# EAGLE board PCB (EAGLE 9.7.0)
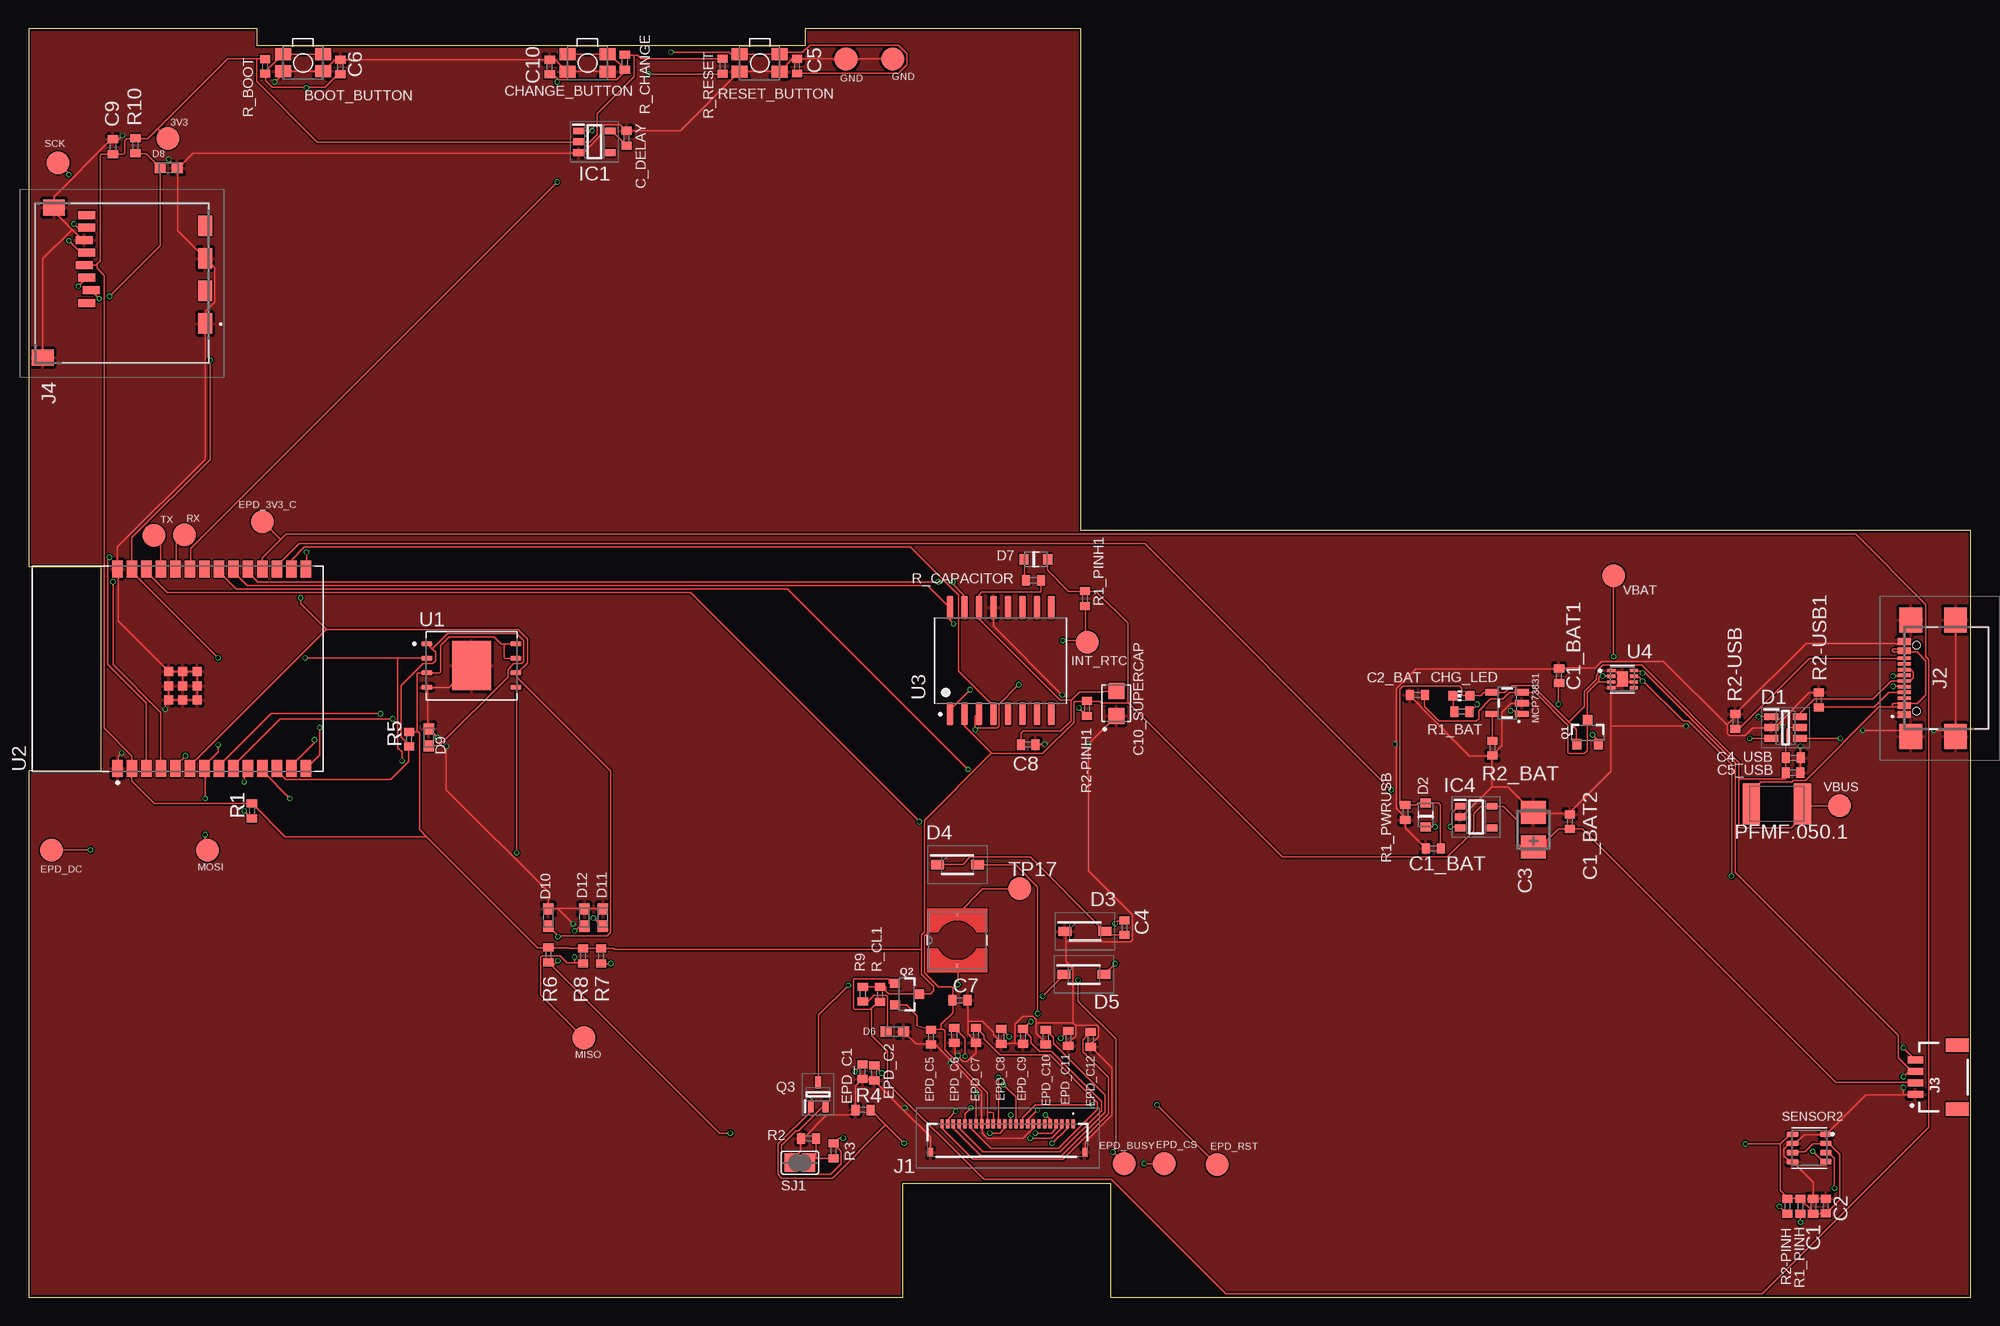
[diagram p0: board, top side]
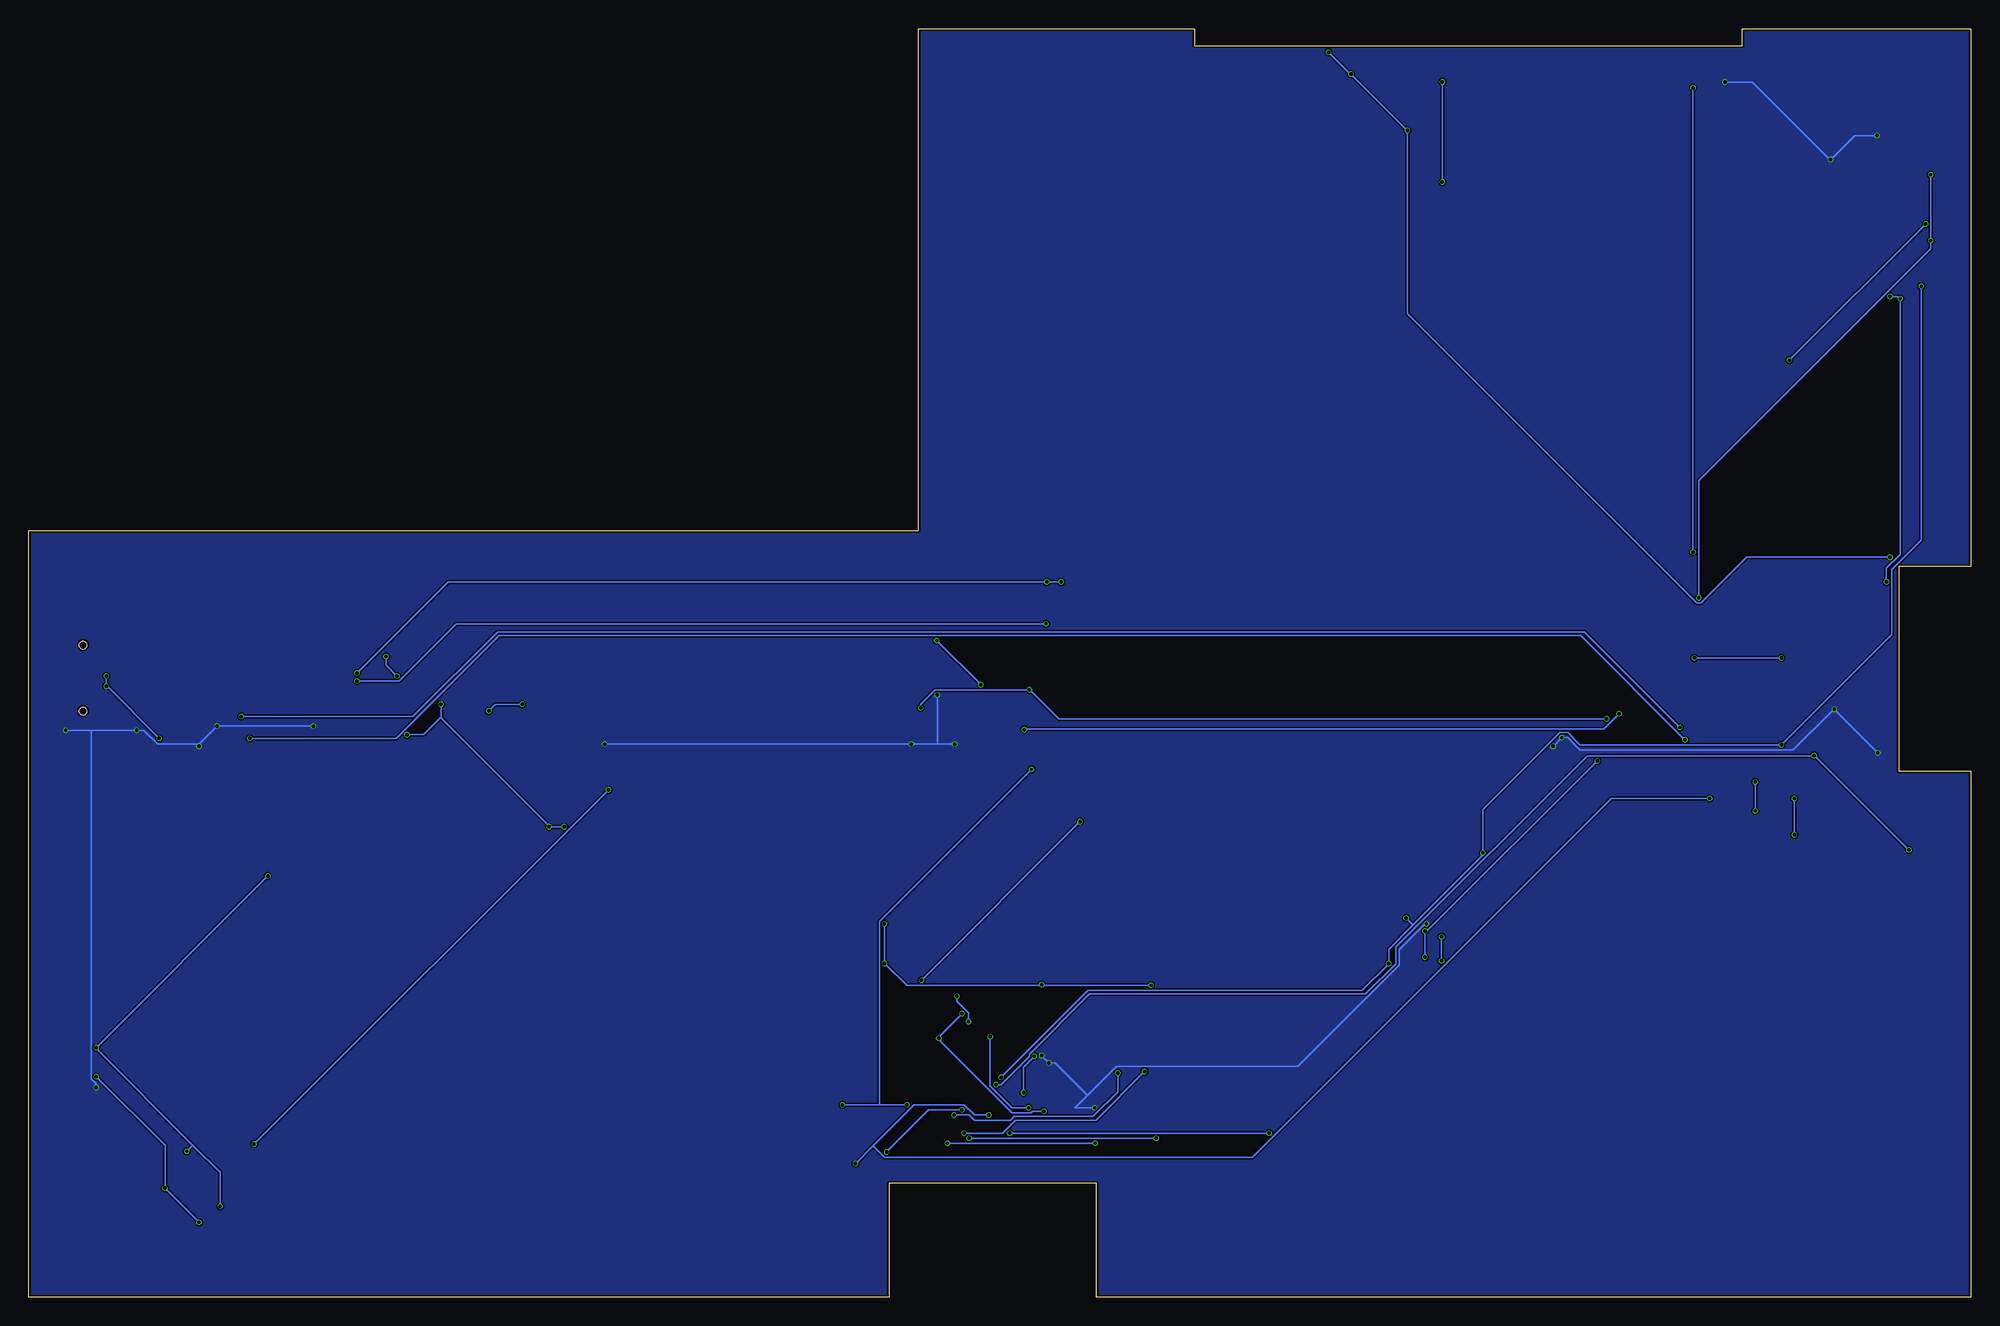
[diagram p1: board, bottom side, seen from below]

Size 170.2 x 111.2 mm. Coordinates in mm from the lower left corner, seen from the top.
Outline: 0,0 76.6,0 76.6,10 94.8,10 94.8,0 170.2,0 170.2,67.2 92.2,67.2 92.2,111.2 68,111.2 68,109.7 20,109.7 20,111.2 0,111.2 0,64.03 6.28,64.03 6.28,46.14 0,46.14 0,0
Copper layers (1*16): Top 0.035mm / dielectric 1.6mm / Bottom 0.035mm
Design rules "jlcpcb-2layers.dru *": minimum track width 5mil, minimum drill 0.3mm, track to track 5mil, track to pad 5mil, pad to pad 5mil, via to via 5mil, smd to smd 5mil, copper to edge 0.2mm, drill to drill 6mil, minimum pad ring 10mil, minimum via ring 3mil, stop-mask expansion 4mil, vias tented up to drill 0mil, thermal gap 10mil
Net classes: 1 Power: width 0.3 mm; 2 Others: width 0.15 mm

## Footprints (pad centres in the part's own frame; a part is rotated, then mirrored left to right if it is on the bottom)
MYBUTTON = smd 1.4 x 1.05: 1 1.75,0.75; 2 -1.75,0.75; 3 -1.75,-0.75; 4 1.75,-0.75
ESP32_WROVER_EAGLE-LTSPICE_C0402 = smd 0.7 x 0.9: 1 -0.65,0; 2 0.65,0
EAGLE-LTSPICE_C0402 = smd 0.7 x 0.9: 1 -0.65,0; 2 0.65,0
RCL_CT3528 = smd 2 x 2.2: + -1.5,0; - 1.5,0
CAPCP3225X100N = smd 1.4 x 1.4: 1 -1.1,0; 2 1.1,0
ADAFRUIT_CHIP-LED0603 = smd 0.8 x 0.8: A 0,-0.75; C 0,0.75
SOT95P280X145-6N = smd 1.2 x 0.6: 1 -1.25,0.95; 2 -1.25,0; 3 -1.25,-0.95; 4 1.25,-0.95; 5 1.25,0; 6 1.25,0.95
ESP32_WROVER_AVX---SD0805S020S1R0_AVX_SD0805S020S1R0_0 = smd 0.8 x 0.9: 1 -1.05,0; 2 1.05,0
SOD3716X135N = smd 1.15 x 0.8: 1 -1.75,0; 2 1.75,0
DIOC1608X36N = smd 0.97 x 0.94: 1 -0.75,0; 2 0.75,0
SOT95P280X125-5N = smd 0.9 x 0.6: 1 -1.4,0.95; 2 -1.4,0; 3 -1.4,-0.95; 4 1.4,-0.95; 5 1.4,0.95
SOT95P280X120-5N = smd 0.9 x 0.6: 1 -1.4,0.95; 2 -1.4,0; 3 -1.4,-0.95; 4 1.4,-0.95; 5 1.4,0.95
FH34SRJ24S05SH99 = smd 0.3 x 0.8: 1 5.75,1.45; 2 5.25,1.45; 3 4.75,1.45; 4 4.25,1.45; 5 3.75,1.45; 6 3.25,1.45; 7 2.75,1.45; 8 2.25,1.45; 9 1.75,1.45; 10 1.25,1.45; 11 0.75,1.45; 12 0.25,1.45; 13 -0.25,1.45; 14 -0.75,1.45; 15 -1.25,1.45; 16 -1.75,1.45; 17 -2.25,1.45; 18 -2.75,1.45; 19 -3.25,1.45; 20 -3.75,1.45; 21 -4.25,1.45; 22 -4.75,1.45; 23 -5.25,1.45; 24 -5.75,1.45 | smd 0.4 x 0.8: MP1 6.75,-1.05; MP2 -6.75,-1.05
SAMACSYS_PARTS_USB4110GFA = smd 0.3 x 1.15: A1 -3.35,3.678; A4 -2.55,3.678; A5 -1.25,3.678; A6 -0.25,3.678; A7 0.25,3.678; A8 1.25,3.678; A9 2.55,3.678; A12 3.35,3.678; B1 3.05,3.678; B4 2.25,3.678; B5 1.75,3.678; B6 0.75,3.678; B7 -0.75,3.678; B8 -1.75,3.678; B9 -2.25,3.678; B12 -3.05,3.678 | smd 2.18 x 2: MP1 -5.11,-0.827; MP2 5.11,-0.827; MP3 -5.11,3.103; MP4 5.11,3.103 | hole 0.65: -2.89,2.603; 2.89,2.603
JST04_1MM_RA = smd 0.6 x 1.35: 1 -1.5,0; 2 -0.5,0; 3 0.5,0; 4 1.5,0 | smd 1.2 x 2: NC1 2.8,-3.675; NC2 -2.8,-3.675
112ATAARR03ATTEND = smd 1.8 x 1.2: G1 10.6,10.4; G2 4.9,10.4; S1 7.75,10.4; S2 2.05,10.4 | smd 1.4 x 1.9: G3 13.6,-3.85; G4 0.45,-2.85 | smd 0.7 x 1.5: P1 8.8,0; P2 7.7,0.4; P3 6.6,0; P4 5.5,-0.2; P5 4.4,0; P6 3.3,-0.2; P7 2.2,0; P8 1.1,0
IND_4828-WE-TPC_WRE = smd 0.406 x 0.203: 1 -2.286,0 | smd 0.305 x 0.152: 2 2.286,0
ESP32_WROVER_SPARKFUN-IC-POWER_SOT23-5 = smd 0.55 x 1.2: 1 -0.95,-1.3; 2 0,-1.3; 3 0.95,-1.3; 4 0.95,1.3; 5 -0.95,1.3
ESP32C6_VARISTOR_CT/CN1812 = smd 1.5 x 3.6: 1 -2.25,0; 2 2.25,0
ESP32_WROVER_SPARKFUN-DISCRETESEMI_SOT23-3 = smd 0.8 x 0.9: 1 -0.95,-1; 2 0.95,-1; 3 0,1.1
SOT65P210X110-3N = smd 1.05 x 0.5: 1 -1.05,0.65; 2 -1.05,-0.65; 3 1.05,0
ESP32_WROVER_EAGLE-LTSPICE_R0402 = smd 0.7 x 0.9: 1 -0.65,0; 2 0.65,0
ESP32_WROVER_BME680_PSON80P300X300X100-8N = smd 1.016 x 0.5: 1 1.458,1.2; 2 1.458,0.4; 3 1.458,-0.4; 4 1.458,-1.2; 5 -1.458,-1.22; 6 -1.458,-0.4; 7 -1.458,0.4; 8 -1.458,1.2
SJ = smd 1.168 x 1.6: 1 -0.762,0; 2 0.762,0
TP20R = smd 2 x 2: TP 0,0
SON127P600X800X80-9N = smd 0.94 x 0.44: 1 -3.895,1.905; 2 -3.895,0.635; 3 -3.895,-0.635; 4 -3.895,-1.905; 5 3.895,-1.905; 6 3.895,-0.635; 7 3.895,0.635; 8 3.895,1.905 | smd 3.4 x 4.3: 9 0,0
XCVR_ESP32-C6-WROOM-1-N8 = smd 1.5 x 0.9: 1 -8.75,5.26; 2 -8.75,3.99; 3 -8.75,2.72; 4 -8.75,1.45; 5 -8.75,0.18; 6 -8.75,-1.09; 7 -8.75,-2.36; 8 -8.75,-3.63; 9 -8.75,-4.9; 10 -8.75,-6.17; 11 -8.75,-7.44; 12 -8.75,-8.71; 13 -8.75,-9.98; 14 -8.75,-11.25; 15 8.75,-11.25; 16 8.75,-9.98; 17 8.75,-8.71; 18 8.75,-7.44; 19 8.75,-6.17; 20 8.75,-4.9; 21 8.75,-3.63; 22 8.75,-2.36; 23 8.75,-1.09; 24 8.75,0.18; 25 8.75,1.45; 26 8.75,2.72; 27 8.75,3.99; 28 8.75,5.26 | smd 0.8 x 0.8: 29_1 -2.755,0.79; 29_2 -1.505,0.79; 29_3 -0.255,0.79; 29_4 -2.755,-0.46; 29_5 -1.505,-0.46; 29_6 -0.255,-0.46; 29_7 -2.755,-1.71; 29_8 -1.505,-1.71; 29_9 -0.255,-1.71
SOIC127P1032X265-16N = smd 2.05 x 0.59: 1 -4.655,4.445; 2 -4.655,3.175; 3 -4.655,1.905; 4 -4.655,0.635; 5 -4.655,-0.635; 6 -4.655,-1.905; 7 -4.655,-3.175; 8 -4.655,-4.445; 9 4.655,-4.445; 10 4.655,-3.175; 11 4.655,-1.905; 12 4.655,-0.635; 13 4.655,0.635; 14 4.655,1.905; 15 4.655,3.175; 16 4.655,4.445
SON50P200X200X80-9N = smd 0.76 x 0.27: 1 -0.985,0.75; 2 -0.985,0.25; 3 -0.985,-0.25; 4 -0.985,-0.75; 5 0.985,-0.75; 6 0.985,-0.25; 7 0.985,0.25; 8 0.985,0.75 | smd 0.9 x 1.3: 9 0,0

## Placement (x,y rotation side)
BOOT_BUTTON  BUTTON_CUSYOMV1  [MYBUTTON]  24.02,108.19 180 top
C1  100nF  [ESP32_WROVER_EAGLE-LTSPICE_C0402]  156.37,7.97 90 top
C1_BAT  4.7uF  [ESP32_WROVER_EAGLE-LTSPICE_C0402]  123.08,39.34 180 top
C1_BAT1  4.7uF  [EAGLE-LTSPICE_C0402]  134.09,54.47 90 top
C1_BAT2  4.7uF  [EAGLE-LTSPICE_C0402]  135.04,41.68 90 top
C2  100nF  [ESP32_WROVER_EAGLE-LTSPICE_C0402]  157.49,7.99 90 top
C2_BAT  4.7uF  [ESP32_WROVER_EAGLE-LTSPICE_C0402]  121.68,52.78 180 top
C3  100uF TANT  [RCL_CT3528]  131.85,40.98 90 top
C4  4.7uF/25V  [ESP32_WROVER_EAGLE-LTSPICE_C0402]  96.01,32.39 90 top
C4_USB  100nF  [ESP32_WROVER_EAGLE-LTSPICE_C0402]  154.64,47.28 0 top
C5  1uF  [ESP32_WROVER_EAGLE-LTSPICE_C0402]  67.31,107.91 90 top
C5_USB  4.7uF  [ESP32_WROVER_EAGLE-LTSPICE_C0402]  154.61,45.97 0 top
C6  100nF  [ESP32_WROVER_EAGLE-LTSPICE_C0402]  27.3,107.83 90 top
C7  10uF  [ESP32_WROVER_EAGLE-LTSPICE_C0402]  81.59,26.03 0 top
C8  100nF  [ESP32_WROVER_EAGLE-LTSPICE_C0402]  87.58,48.43 0 top
C9  100nF  [ESP32_WROVER_EAGLE-LTSPICE_C0402]  7.36,100.83 90 top
C10  100nF  [ESP32_WROVER_EAGLE-LTSPICE_C0402]  45.64,107.83 90 top
C10_SUPERCAP  CPH3225A  [CAPCP3225X100N]  95.29,52.04 90 top
C_DELAY  100nF  [ESP32_WROVER_EAGLE-LTSPICE_C0402]  52.37,101.59 90 top
CHANGE_BUTTON  BUTTON_CUSYOMV1  [MYBUTTON]  48.95,108.18 180 top
CHG_LED  [ADAFRUIT_CHIP-LED0603]  125.54,52.71 90 top
D1  USBLC6-2SC6Y  [SOT95P280X145-6N]  153.95,49.92 0 top
D2  ESP32_WROVER_AVX---SD0805S020S1R0_AVX_SD0805S020S1R0_0_0AVX_SD0805S020S1R0_0_0  [ESP32_WROVER_AVX---SD0805S020S1R0_AVX_SD0805S020S1R0_0]  122.4,42.27 90 top
D3  MBR0530  [SOD3716X135N]  92.56,32.07 0 top
D4  MBR0530  [SOD3716X135N]  81.38,37.91 0 top
D5  MBR0530  [SOD3716X135N]  92.46,28.28 0 top
D6  PGB1010603MR  [DIOC1608X36N]  75.88,23.27 0 top
D7  ESP32_WROVER_AVX---SD0805S020S1R0_AVX_SD0805S020S1R0_0_0AVX_SD0805S020S1R0_0_0  [ESP32_WROVER_AVX---SD0805S020S1R0_AVX_SD0805S020S1R0_0]  88.24,64.68 0 top
D8  PGB1010603MR  [DIOC1608X36N]  12.26,98.97 0 top
D9  PGB1010603MR  [DIOC1608X36N]  35.04,49.07 90 top
D10  PGB1010603MR  [DIOC1608X36N]  45.52,33.27 90 top
D11  PGB1010603MR  [DIOC1608X36N]  50.3,33.27 90 top
D12  PGB1010603MR  [DIOC1608X36N]  48.68,33.27 90 top
EPD_C1  1uF/50V  [ESP32_WROVER_EAGLE-LTSPICE_C0402]  73.05,19.77 90 top
EPD_C2  1uF/50V  [ESP32_WROVER_EAGLE-LTSPICE_C0402]  74.08,19.65 90 top
EPD_C5  0.1uF/50V  [ESP32_WROVER_EAGLE-LTSPICE_C0402]  79.05,22.79 90 top
EPD_C6  1uF/50V  [ESP32_WROVER_EAGLE-LTSPICE_C0402]  81.09,22.95 90 top
EPD_C7  1uF/50V  [ESP32_WROVER_EAGLE-LTSPICE_C0402]  83,22.95 90 top
EPD_C8  1uF/50V  [ESP32_WROVER_EAGLE-LTSPICE_C0402]  85.21,22.85 90 top
EPD_C9  1uF/50V  [ESP32_WROVER_EAGLE-LTSPICE_C0402]  87.12,22.85 90 top
EPD_C10  1uF/50V  [ESP32_WROVER_EAGLE-LTSPICE_C0402]  89.11,22.79 90 top
EPD_C11  1uF/50V  [ESP32_WROVER_EAGLE-LTSPICE_C0402]  91.09,22.69 90 top
EPD_C12  1uF/50V  [ESP32_WROVER_EAGLE-LTSPICE_C0402]  93.05,22.59 90 top
IC1  BD5229G-TR  [SOT95P280X125-5N]  49.55,101.27 0 top
IC4  XC6220A331MR-G  [SOT95P280X120-5N]  126.83,42.09 0 top
J1  FH34SRJ-24S-0.5SH_99_  [FH34SRJ24S05SH99]  85.77,13.74 0 top
J2  SAMACSYS_PARTS_USB4110-GF-A  [SAMACSYS_PARTS_USB4110GFA]  168.02,54.26 90 top
J3  QWIIC_RIGHT_ANGLE  [JST04_1MM_RA]  165.32,19.29 90 top
J4  112A-TAAR-R03_ATTEND  [112ATAARR03ATTEND]  5.05,95.95 270 top
L1  68uH  [IND_4828-WE-TPC_WRE]  81.35,31.28 90 top
MCP73831  ESP32_WROVER_SPARKFUN-IC-POWER_MCP73831  [ESP32_WROVER_SPARKFUN-IC-POWER_SOT23-5]  129.55,52.06 90 top
PFMF.050.1  ESP32C6_VARISTORCN1812  [ESP32C6_VARISTOR_CT/CN1812]  153.19,43.25 0 top
Q1  20V/4.2A/52mΩ/1.4W  [ESP32_WROVER_SPARKFUN-DISCRETESEMI_SOT23-3]  136.6,49.46 0 top
Q2  20V/4.2A/52mΩ/1.4W  [ESP32_WROVER_SPARKFUN-DISCRETESEMI_SOT23-3]  76.9,26.56 270 top
Q3  SI1308EDL-T1-GE3  [SOT65P210X110-3N]  69.16,17.78 90 top
R1  10K  [ESP32_WROVER_EAGLE-LTSPICE_R0402]  19.55,42.63 90 top
R1_BAT  200  [ESP32_WROVER_EAGLE-LTSPICE_R0402]  125.59,51.32 0 top
R1_PINH  10K  [ESP32_WROVER_EAGLE-LTSPICE_R0402]  155.25,7.97 90 top
R1_PINH1  10K  [ESP32_WROVER_EAGLE-LTSPICE_R0402]  92.56,61.24 90 top
R1_PWRUSB  100K  [ESP32_WROVER_EAGLE-LTSPICE_R0402]  120.62,42.5 90 top
R2  2.2  [ESP32_WROVER_EAGLE-LTSPICE_R0402]  68.33,13.91 0 top
R2-PINH  10K  [ESP32_WROVER_EAGLE-LTSPICE_R0402]  154.11,7.97 90 top
R2-PINH1  10K  [ESP32_WROVER_EAGLE-LTSPICE_R0402]  92.73,51.59 90 top
R2-USB  5k1  [ESP32_WROVER_EAGLE-LTSPICE_R0402]  149.56,50.46 90 top
R2-USB1  5k1  [ESP32_WROVER_EAGLE-LTSPICE_R0402]  156.85,52.34 90 top
R2_BAT  2K  [ESP32_WROVER_EAGLE-LTSPICE_R0402]  128.25,48.12 90 top
R3  0.47  [ESP32_WROVER_EAGLE-LTSPICE_R0402]  70.51,12.83 90 top
R4  10K  [ESP32_WROVER_EAGLE-LTSPICE_R0402]  73.09,16.41 0 top
R5  10K  [ESP32_WROVER_EAGLE-LTSPICE_R0402]  33.31,48.91 90 top
R6  10K  [ESP32_WROVER_EAGLE-LTSPICE_R0402]  45.53,30.01 90 top
R7  10K  [ESP32_WROVER_EAGLE-LTSPICE_R0402]  50.15,29.91 90 top
R8  10K  [ESP32_WROVER_EAGLE-LTSPICE_R0402]  48.57,29.91 90 top
R9  10K  [ESP32_WROVER_EAGLE-LTSPICE_R0402]  73.08,26.56 90 top
R10  10K  [ESP32_WROVER_EAGLE-LTSPICE_R0402]  9.33,100.93 90 top
R_BOOT  10K  [ESP32_WROVER_EAGLE-LTSPICE_R0402]  20.71,107.87 90 top
R_CAPACITOR  15  [ESP32_WROVER_EAGLE-LTSPICE_R0402]  88.05,62.84 0 top
R_CHANGE  10K  [ESP32_WROVER_EAGLE-LTSPICE_R0402]  52.22,108.24 90 top
R_CL1  10K  [ESP32_WROVER_EAGLE-LTSPICE_R0402]  74.58,26.53 90 top
R_RESET  10K  [ESP32_WROVER_EAGLE-LTSPICE_R0402]  60.79,107.89 90 top
RESET_BUTTON  BUTTON_CUSYOMV1  [MYBUTTON]  64.05,108.18 180 top
SENSOR2  BME688  [ESP32_WROVER_BME680_PSON80P300X300X100-8N]  156.02,13.08 0 top
SJ1  [SJ]  67.56,11.79 0 top
TP1  TPTP20R  [TP20R]  10.96,66.76 0 top
TP2  TPTP20R  [TP20R]  13.62,66.81 0 top
TP3  TPTP20R  [TP20R]  138.88,63.24 0 top
TP4  TPTP20R  [TP20R]  71.61,108.51 0 top
TP5  TPTP20R  [TP20R]  75.71,108.54 0 top
TP6  TPTP20R  [TP20R]  48.64,22.73 0 top
TP7  TPTP20R  [TP20R]  15.65,39.16 0 top
TP8  TPTP20R  [TP20R]  2.55,99.42 0 top
TP9  TPTP20R  [TP20R]  95.99,11.71 0 top
TP10  TPTP20R  [TP20R]  99.49,11.69 0 top
TP11  TPTP20R  [TP20R]  1.96,39.19 0 top
TP12  TPTP20R  [TP20R]  104.13,11.62 0 top
TP13  TPTP20R  [TP20R]  20.46,67.97 0 top
TP14  TPTP20R  [TP20R]  158.7,43.07 0 top
TP15  TPTP20R  [TP20R]  92.75,57.42 0 top
TP16  TPTP20R  [TP20R]  12.18,101.56 0 top
TP17  TPTP20R  [TP20R]  86.82,35.82 0 top
U1  W25Q512JVEIQ  [SON127P600X800X80-9N]  38.79,55.36 0 top
U2  ESP32-C6-WROOM-1-N8  [XCVR_ESP32-C6-WROOM-1-N8]  13.03,55.09 90 top
U3  DS3231SN#  [SOIC127P1032X265-16N]  85.15,55.8 90 top
U4  MAX17048G+T10  [SON50P200X200X80-9N]  139.66,54.17 0 top

## Library data of the parts
BOOT_BUTTON CHANGE_BUTTON CHG_LED PFMF.050.1 RESET_BUTTON SJ1 TP1-TP17 = DeskAssistant v19 v1
C1 C1_BAT C1_BAT1 C1_BAT2 C2 C2_BAT C4 C4_USB C5 C5_USB C6-C10 C_DELAY EPD_C1 EPD_C2 EPD_C5-EPD_C12 = DeskAssistant v19 v1; SPICEMODEL: NONE; SPICEPREFIX: C
C3 = DeskAssistant v19 v1; SPICEPREFIX: C
C10_SUPERCAP = DeskAssistant v19 v1; AVAILABILITY: Not in stock; CHECK_PRICES: https://www.snapeda.com/parts/CPH3225A/Seiko+Instruments/view-part/?ref=eda; DESCRIPTION: 11 mF (EDLC) Supercapacitor 3.3 V 1210 (3225 Metric) - -; MF: Seiko Instruments; MP: CPH3225A; PACKAGE: 1210 Seiko; PRICE: None; PURCHASE-URL: https://www.snapeda.com/api/url_track_click_mouser/?unipart_id=562593&manufacturer=Seiko Instruments&part_name=CPH3225A&search_term=None; SNAPEDA_LINK: https://www.snapeda.com/parts/CPH3225A/Seiko+Instruments/view-part/?ref=snap
D1 = DeskAssistant v19 v1; AVAILABILITY: In Stock; CHECK_PRICES: https://www.snapeda.com/parts/USBLC6-2SC6Y/STMicroelectronics/view-part/?ref=eda; DESCRIPTION: 17V Clamp 5A (8/20µs) Ipp Tvs Diode Surface Mount SOT-23-6; DETAILS: USBLC6-2SC6Y; MF: STMicroelectronics; MP: USBLC6-2SC6Y; NUME: D1; PACKAGE: SOT-23-6 STMicroelectronics; PRICE: None; SNAPEDA_LINK: https://www.snapeda.com/parts/USBLC6-2SC6Y/STMicroelectronics/view-part/?ref=snap
D2 = DeskAssistant v19 v1; CENTROID_NOT_SPECIFIED: No; DATASHEET: http://datasheets.avx.com/schottky.pdf; DETAILS: SD0805S020S1R0; DIGIKEY_DESCRIPTION: DIODE SCHOTTKY 20V 1A 0805; DIGIKEY_PART_NUMBER: 478-7800-1-ND; LEAD_FREE: yes; MF: AVX; MOUSER_PART_NUMBER: 581-SD0805S020S1R0; PACKAGE: 0805 (2012 metric); PREFIX: D; ROHS: yes; TEMPERATURE_RANGE_HIGH: +125°C; TEMPERATURE_RANGE_LOW: -55°C
D3-D5 = DeskAssistant v19 v1; AVAILABILITY: In Stock; CHECK_PRICES: https://www.snapeda.com/parts/MBR0530/Onsemi/view-part/?ref=eda; DESCRIPTION: Diode Schottky 30 V 500mA Surface Mount SOD-123; MF: ON Semiconductor; MP: MBR0530; PACKAGE: SOD-123-2 ON Semiconductor; PRICE: None; PURCHASE-URL: https://www.snapeda.com/api/url_track_click_mouser/?unipart_id=179458&manufacturer=ON Semiconductor&part_name=MBR0530&search_term=None; SNAPEDA_LINK: https://www.snapeda.com/parts/MBR0530/Onsemi/view-part/?ref=snap
D6 D8-D12 = DeskAssistant v19 v1; AVAILABILITY: In Stock; CHECK_PRICES: https://www.snapeda.com/parts/PGB1010603MR/Littelfuse/view-part/?ref=eda; DESCRIPTION: 150V (Typ) Clamp - Ipp Tvs Diode Surface Mount 0603 (1608 Metric); MF: Littelfuse Inc.; MP: PGB1010603MR; PACKAGE: 0603 Littelfuse Inc.; PRICE: None; PURCHASE-URL: https://www.snapeda.com/api/url_track_click_mouser/?unipart_id=5659453&manufacturer=Littelfuse Inc.&part_name=PGB1010603MR&search_term=None; SNAPEDA_LINK: https://www.snapeda.com/parts/PGB1010603MR/Littelfuse/view-part/?ref=snap
D7 = DeskAssistant v19 v1; CENTROID_NOT_SPECIFIED: No; DATASHEET: http://datasheets.avx.com/schottky.pdf; DIGIKEY_DESCRIPTION: DIODE SCHOTTKY 20V 1A 0805; DIGIKEY_PART_NUMBER: 478-7800-1-ND; LEAD_FREE: yes; MF: AVX; MOUSER_PART_NUMBER: 581-SD0805S020S1R0; PACKAGE: 0805 (2012 metric); PREFIX: D; ROHS: yes; TEMPERATURE_RANGE_HIGH: +125°C; TEMPERATURE_RANGE_LOW: -55°C; VALOARE: SD0805S020S1R0
IC1 = DeskAssistant v19 v1; DESCRIPTION: Voltage Detector with Adjustable Delay Time: CMOS processes are utilized to develop high precision, low current consumption CMOS reset ICs that allow arbitrary setting of the delay time. The extensive lineup includes both Nch Open Drain and CMOS output types in a wide range of detection voltages (from 2.3V to 6.0V, in 0.1V steps), enabling selection of the ideal solution based on customer requirements. In addition, the entire series is of course both lead-free and RoHS-compliant.; HEIGHT: 1.25mm; MANUFACTURER_NAME: ROHM Semiconductor; MANUFACTURER_PART_NUMBER: BD5229G-TR; MOUSER_PART_NUMBER: 755-BD5229G-TR; MOUSER_PRICE-STOCK: https://www.mouser.co.uk/ProductDetail/ROHM-Semiconductor/BD5229G-TR?qs=4kLU8WoGk0vvnhrrYwdszw%3D%3D
IC4 = DeskAssistant v19 v1; DESCRIPTION: LDO Voltage Regulators; HEIGHT: 1.2mm; MANUFACTURER_NAME: Torex; MANUFACTURER_PART_NUMBER: XC6220A331MR-G; MOUSER_PART_NUMBER: 865-XC6220A331MR-G; MOUSER_PRICE-STOCK: https://www.mouser.co.uk/ProductDetail/Torex-Semiconductor/XC6220A331MR-G?qs=AsjdqWjXhJ8ZSWznL1J0gg%3D%3D
J1 = DeskAssistant v19 v1; DESCRIPTION: 24 Position FFC, FPC Connector Contacts, Top and Bottom 0.020" (0.50mm) Surface Mount, Right Angle; HEIGHT: 1.1mm; MANUFACTURER_NAME: Hirose; MANUFACTURER_PART_NUMBER: FH34SRJ-24S-0.5SH(99); MOUSER_PART_NUMBER: 798-FH34SRJ24S05SH99; MOUSER_PRICE-STOCK: https://www.mouser.co.uk/ProductDetail/Hirose-Connector/FH34SRJ-24S-0.5SH99?qs=vcbW%252B4%252BSTIpKBl5ap9J8Fw%3D%3D
J2 = DeskAssistant v19 v1; DESCRIPTION: CONN USB 2.0 TYPE-C R/A SMT; HEIGHT: 3.26mm; MANUFACTURER_NAME: GCT (GLOBAL CONNECTOR TECHNOLOGY); MANUFACTURER_PART_NUMBER: USB4110-GF-A; MOUSER_PART_NUMBER: 640-USB4110-GF-A; MOUSER_PRICE-STOCK: https://www.mouser.co.uk/ProductDetail/GCT/USB4110-GF-A?qs=KUoIvG%2F9IlYiZvIXQjyJeA%3D%3D
J3 = DeskAssistant v19 v1; PROD_ID: CONN-13694
J4 = DeskAssistant v19 v1; DESCRIPTION: Micro SD Card Socket, Push-Push Type, Top Mount, SMT, H=1.83mm, 10u; HEIGHT: 1.9mm; MANUFACTURER_NAME: ATTEND; MANUFACTURER_PART_NUMBER: 112A-TAAR-R03 ATTEND
L1 = DeskAssistant v19 v1; COPYRIGHT: Copyright (C) 2024 Ultra Librarian. All rights reserved.; MANUFACTURER_PART_NUMBER: 744043680; MFR_NAME: Wurth Electronics; VALOARE: 68uH
MCP73831 = DeskAssistant v19 v1; PROD_ID: IC-09995
Q1 Q2 = DeskAssistant v19 v1; DETAILS: DMG2305UX-7; PROD_ID: TRAN-14388
Q3 = DeskAssistant v19 v1; AVAILABILITY: In Stock; CHECK_PRICES: https://www.snapeda.com/parts/SI1308EDL-T1-GE3/Vishay+Siliconix/view-part/?ref=eda; DESCRIPTION: Si1308EDL-T1-GE3 N-channel MOSFET Transistor, 1.5 A, 30 V, 3-Pin SC-70 | Siliconix / Vishay SI1308EDL-T1-GE3; MF: Vishay Siliconix; MP: SI1308EDL-T1-GE3; PACKAGE: SOT-323 Vishay Semiconductor; PRICE: None; PURCHASE-URL: https://www.snapeda.com/api/url_track_click_mouser/?unipart_id=274603&manufacturer=Vishay Siliconix&part_name=SI1308EDL-T1-GE3&search_term=None; SNAPEDA_LINK: https://www.snapeda.com/parts/SI1308EDL-T1-GE3/Vishay+Siliconix/view-part/?ref=snap
R1 R1_BAT R1_PINH R1_PINH1 R1_PWRUSB R2 R2-PINH R2-PINH1 R2-USB R2-USB1 R2_BAT R3-R10 R_BOOT R_CAPACITOR R_CHANGE R_CL1 R_RESET = DeskAssistant v19 v1; SPICEMODEL: NONE; SPICEPREFIX: R
SENSOR2 = DeskAssistant v19 v1; AVAILABILITY: Unavailable; DESCRIPTION: Integrated Environmental Unit; MF: Bosch Sensortec; MP: BME680; PACKAGE: LGA-8 Bosch Tools; PRICE: None
U1 = DeskAssistant v19 v1; AVAILABILITY: In Stock; CHECK_PRICES: https://www.snapeda.com/parts/W25Q512JVEIQ/Winbond+Electronics/view-part/?ref=eda; DESCRIPTION: FLASH - NOR Memory IC 512Mb (64M x 8) SPI - Quad I/O 133 MHz 8-WSON (8x6); MF: Winbond Electronics; MP: W25Q512JVEIQ; PACKAGE: Package; PRICE: None; SNAPEDA_LINK: https://www.snapeda.com/parts/W25Q512JVEIQ/Winbond+Electronics/view-part/?ref=snap
U2 = DeskAssistant v19 v1; AVAILABILITY: In Stock; CHECK_PRICES: https://www.snapeda.com/parts/ESP32-C6-WROOM-1-N8/Espressif+Systems/view-part/?ref=eda; DESCRIPTION: Multiprotocol Modules ESP32-C6 module, Wi-Fi 6 in 2.4 GHz band, Bluetooth 5, Zigbee 3.0 and Thread. ESP34-WROOM Compatible - ENGINEERING SAMPLE; MF: Espressif Systems; MP: ESP32-C6-WROOM-1-N8; PACKAGE: None; PRICE: None; SNAPEDA_LINK: https://www.snapeda.com/parts/ESP32-C6-WROOM-1-N8/Espressif+Systems/view-part/?ref=snap
U3 = DeskAssistant v19 v1; AVAILABILITY: In Stock; CHECK_PRICES: https://www.snapeda.com/parts/DS3231SN%23/Analog+Devices/view-part/?ref=eda; DESCRIPTION: Extremely Accurate I²C-Integrated RTC/TCXO/Crystal; MF: Analog Devices; MP: DS3231SN#; PACKAGE: SOIC-16 Maxim; PRICE: None; PURCHASE-URL: https://www.snapeda.com/api/url_track_click_mouser/?unipart_id=99048&manufacturer=Analog Devices&part_name=DS3231SN#&search_term=None; SNAPEDA_LINK: https://www.snapeda.com/parts/DS3231SN%23/Analog+Devices/view-part/?ref=snap
U4 = DeskAssistant v19 v1; AVAILABILITY: In Stock; CHECK_PRICES: https://www.snapeda.com/parts/MAX17048G+T10/Analog+Devices/view-part/?ref=eda; DESCRIPTION: 3µA 1-Cell/2-Cell Fuel Gauge with ModelGauge; MF: Analog Devices; MP: MAX17048G+T10; PACKAGE: TDFN-8 Maxim; PRICE: None; PURCHASE-URL: https://www.snapeda.com/api/url_track_click_mouser/?unipart_id=329239&manufacturer=Analog Devices&part_name=MAX17048G+T10&search_term=None; SNAPEDA_LINK: https://www.snapeda.com/parts/MAX17048G+T10/Analog+Devices/view-part/?ref=snap

## Nets
3V3: C1_BAT2.1 C3.+ C9.1 D7.2 IC1.2 IC4.5 J3.2 J4.P4 Q2.3 R1.2 R1_PINH1.2 R2-PINH1.2 R5.2 R6.2 R7.2 R8.2 R9.2 R10.2 R_BOOT.2 R_CHANGE.2 R_CL1.2 R_RESET.2 TP16.TP U1.3 U1.7 U1.8 U2.2 U3.2
32KHZ [Others]: R2-PINH1.1 U2.9 U3.1
DN [Others]: D1.4 J2.A7 J2.B7
DP [Others]: D1.6 J2.A6 J2.B6
EDP_CS [Others]: D6.1 R9.1
EPD_3V3: C7.1 EPD_C5.2 J1.15 J1.16 L1.2 Q2.2 TP17.TP
EPD_3V3_C: Q2.1 R_CL1.1 TP13.TP U2.18
EPD_BUSY [Others]: J1.9 TP9.TP U2.26
EPD_CS [Others]: J1.12 TP10.TP U2.11
EPD_DC [Others]: J1.11 TP11.TP U2.5
EPD_RST [Others]: J1.10 TP12.TP U2.21
FLASH_CS [Others]: D9.1 R5.1 U1.1 U2.12
GDR [Others]: J1.2 Q3.1 R4.2
GND [Others]: BOOT_BUTTON.1 BOOT_BUTTON.2 C1.2 C1_BAT1.2 C1_BAT2.2 C1_BAT.2 C2.2 C2_BAT.2 C3.- C4_USB.2 C5.2 C5_USB.2 C6.2 C7.2 C8.2 C9.2 C10.2 C10_SUPERCAP.1 C_DELAY.2 CHANGE_BUTTON.1 CHANGE_BUTTON.2 D1.2 D3.1 D6.2 D8.2 D9.2 D10.2 D11.2 D12.2 EPD_C1.1 EPD_C2.1 EPD_C5.1 EPD_C6.1 EPD_C7.1 EPD_C8.1 EPD_C9.1 EPD_C10.1 EPD_C11.1 EPD_C12.1 IC1.3 IC4.2 J1.8 J1.17 J1.MP1 J1.MP2 J2.A1 J2.A12 J2.B1 J2.B12 J2.MP1 J2.MP2 J2.MP3 J2.MP4 J3.1 J4.G1 J4.G2 J4.G3 J4.G4 J4.P6 MCP73831.2 R1_PWRUSB.1 R2-USB1.2 R2-USB.2 R2.1 R2_BAT.1 R4.1 RESET_BUTTON.1 RESET_BUTTON.2 SENSOR2.1 SENSOR2.5 SENSOR2.7 SJ1.1 TP4.TP TP5.TP U1.4 U1.9 U2.1 U2.28 U2.29_1 U2.29_2 U2.29_3 U2.29_4 U2.29_5 U2.29_6 U2.29_7 U2.29_8 U2.29_9 U3.13 U4.1 U4.4 U4.6 U4.9
GPIO8 [Others]: R1.1 U2.10
I2C_PW [Others]: C1.1 C2.1 R1_PINH.2 R2-PINH.2 SENSOR2.2 SENSOR2.6 SENSOR2.8 U2.17
INT_RTC [Others]: R1_PINH1.1 TP15.TP U2.8 U3.3
IO/BOOT [Others]: BOOT_BUTTON.3 BOOT_BUTTON.4 C6.1 R_BOOT.1 U2.15
IO/CHANGE [Others]: C10.1 CHANGE_BUTTON.3 CHANGE_BUTTON.4 R_CHANGE.1 U2.23
MISO [Others]: D12.1 J4.P7 R8.1 TP6.TP U1.2 U2.27
MOSI [Others]: D11.1 J1.14 J4.P3 R7.1 TP7.TP U1.5 U2.7
N$1 [Others]: J2.A5 R2-USB1.1
N$2 [Others]: J2.B5 R2-USB.1
N$3 [Others]: C1_BAT1.1 D2.1 IC4.1 IC4.3 Q1.2
N$4 [Others]: D7.1 R_CAPACITOR.1
N$5 [Others]: C_DELAY.1 IC1.5
N$6 [Others]: MCP73831.1 R1_BAT.2
N$7 [Others]: C4.1 D3.2 D4.1
N$8 [Others]: CHG_LED.C R1_BAT.1
N$9 [Others]: EPD_C12.2 J1.24
N$12 [Others]: EPD_C10.2 J1.22
N$14 [Others]: EPD_C8.2 J1.20
N$15 [Others]: EPD_C7.2 J1.19
N$16 [Others]: EPD_C6.2 J1.18
N$17 [Others]: MCP73831.5 R2_BAT.2
N$18 [Others]: EPD_C1.2 J1.4
N$19 [Others]: EPD_C2.2 J1.5
PREVGH [Others]: D5.1 EPD_C9.2 J1.21
PREVGL [Others]: D4.2 EPD_C11.2 J1.23
RESE [Others]: J1.3 Q3.2 R3.2
RESE' [Others]: R2.2 R3.1 SJ1.2
RESET [Others]: C5.1 IC1.1 R_RESET.1 RESET_BUTTON.3 RESET_BUTTON.4 U2.3
RTC_RST [Others]: U2.16 U3.4
RX [Others]: TP2.TP U2.24
SCK [Others]: D10.1 J1.13 J4.P5 R6.1 TP8.TP U1.6 U2.6
SCL [Others]: J3.4 R2-PINH.1 SENSOR2.4 U2.20 U3.16 U4.7
SDA [Others]: J3.3 R1_PINH.1 SENSOR2.3 U2.19 U3.15 U4.8
SRC [Others]: C4.2 D5.2 L1.1 Q3.3
SS_SD [Others]: D8.1 J4.P2 R10.1 U2.4
TX [Others]: TP1.TP U2.25
USB_D+ [Others]: D1.1 U2.14
USB_D- [Others]: D1.3 U2.13
VBAT: C2_BAT.1 MCP73831.3 Q1.3 TP3.TP U4.2 U4.3
VBUS: C1_BAT.1 C4_USB.1 C5_USB.1 CHG_LED.A D1.5 D2.2 MCP73831.4 PFMF.050.1.2 Q1.1 R1_PWRUSB.2 TP14.TP
VRTC: C8.1 C10_SUPERCAP.2 R_CAPACITOR.2 U3.14
VUSB: J2.A4 J2.A9 J2.B4 J2.B9 PFMF.050.1.1

## Tracks (layer width: path | path; a pad name or v marks a point on that pad's centre or on a via)
3V3
  Top 0.127: 52.99,108.83 52.96,108.86 52.26,108.86 R_CHANGE.2 | 52.99,108.83 53.02,108.8 53.02,106.96 49.78,103.72 49.78,101.88 49.15,101.24 48.2,101.24 IC1.2 48.13,101.24 25.27,101.24 19.94,106.58 19.94,108.55 | R_RESET.2 60.77,108.55 53.66,108.55 53.34,108.86 53.02,108.86 52.99,108.83 | 19.94,108.55 17.4,108.55 11.27,102.42 | 19.94,108.55 20.7,108.55 R_BOOT.2 | 11.27,102.42 10.41,101.56 9.34,101.56 R10.2 9.27,101.56 8.57,101.56 8.38,101.37 8.38,100.23 8.32,100.16 7.37,100.16 C9.1 7.3,100.16 6.29,100.16 6.22,100.1 6.22,90.83 5.94,90.54 | 5.94,90.54 5.84,90.45 4.89,90.45 J4.P4 | J3.2 165.29,18.82 158.37,18.82 136.14,41.05 135.06,41.05 C1_BAT2.1 135,41.05 134.05,41.05 133.03,40.03 133.03,39.52 132.97,39.46 131.89,39.46 C3.+ 131.83,39.46 130.75,39.46 130.43,39.77 130.43,41.81 129.22,43.01 128.27,43.01 IC4.5 128.21,43.01 127.25,43.01 126.62,42.38 126.62,40.85 124.33,38.57 109.86,38.57 96.3,52.13 | D7.2 89.28,64.67 89.28,63.71 91.12,61.87 92.52,61.87 R1_PINH1.2 92.58,61.87 93.53,61.87 96.33,59.08 96.33,52.16 96.3,52.13 | R9.2 74.55,27.2 R_CL1.2 74.61,27.2 75.12,27.2 75.12,26.82 75.37,26.57 77.98,26.57 Q2.3 78.04,26.57 78.99,26.57 79.26,26.83 79.26,27.26 78.23,28.28 78.23,30.5 | 84.36,47.68 81.98,50.06 U3.2 | 84.36,47.68 84.39,47.65 88.84,47.65 91.57,50.38 91.57,52.16 91.63,52.22 92.71,52.22 R2-PINH1.2 92.77,52.22 93.85,52.22 93.98,52.09 96.27,52.09 96.3,52.13 | 78.23,30.5 78.23,31.77 78.49,32.03 78.49,41.81 84.36,47.68 | 41.69,57.21 41.72,57.24 42.67,57.24 U1.8 | 41.69,57.21 41.66,57.17 41.66,56.03 41.72,55.97 42.67,55.97 U1.7 | 34.04,49.55 33.34,49.55 R5.2
  Top 0.127: 34.04,49.55 34.04,54.63 34.1,54.7 34.86,54.7 U1.3 34.92,54.7 36.01,54.7 36.07,54.76 36.07,57.11 36.83,57.87 40.77,57.87 41.4,57.24 41.66,57.24 41.69,57.21 | 34.85,40.36 34.23,40.98 34.23,43.27 34.25,43.27 34.25,49.47 34.16,49.55 34.04,49.55 | 34.85,40.36 44.58,30.63 45.53,30.63 R6.2 45.59,30.63 47.37,30.63 47.43,30.57 48.51,30.57 R8.2 50.1,30.57 R7.2 50.16,30.57 51.24,30.57 51.31,30.5 78.23,30.5 | 5.94,90.54 5.97,90.51 5.97,90.19 6.6,89.56 6.6,49.87 9.02,47.46 9.02,46.38 U2.2 9.02,46.31 9.02,45.24 10.99,43.27 19.49,43.27 R1.2 22.47,40.36 34.85,40.36 | 11.27,102.42 12.13,101.56 TP16.TP
32KHZ  (via drill 0.3)
  Top 0.15: v92.01,51.65 92.71,50.95 R2-PINH1.1 | v82.49,53.24 80.71,51.46 80.71,51.2 U3.1 | v31.88,50.7 22.04,50.7 17.97,46.63 17.97,46.38 U2.9
  Bottom 0.15: v92.01,51.65 92.01,51.97 90.74,53.24 v82.49,53.24 82.42,53.24 79.88,50.7 v31.88,50.7
DN  (via drill 0.3)
  Top 0.15: v163.39,53.55 164.34,53.55 J2.B7 | v163.39,54.44 164.27,54.44 J2.A7 | v158.75,48.98 155.26,48.98 D1.4
  Bottom 0.15: v163.39,54.44 v163.39,53.55 163.32,53.55 v158.75,48.98
DP
  Top 0.15: J2.B6 164.4,54.95 164.97,54.95 165.16,54.76 165.16,54.32 164.91,54.06 164.4,54.06 J2.A6 164.27,54 163.19,54 161.61,52.41 156.46,52.41 155.26,51.2 155.26,50.89 D1.6
EDP_CS
  Top 0.15: R9.1 73.09,25.93 73.53,25.93 74.04,26.44 75.12,26.44 75.25,26.31 75.25,23.39 75.18,23.33 D6.1
EPD_3V3
  Top 0.127: 84.04,16.18 84.07,16.22 84.45,16.22 84.52,16.15 J1.15 | 84.04,16.18 84.01,16.15 J1.16 | 77.85,23.77 77.85,24.66 76.9,25.61 75.95,25.61 Q2.2 | 77.85,23.77 | 77.85,23.77 EPD_C5.2 79.06,23.45 79.88,23.45 79.92,23.49 | 79.92,23.49 79.95,23.52 79.95,23.9 80.96,24.92 80.96,26 C7.1 80.96,26.06 80.96,27.14 80.9,27.2 79.69,27.2 78.49,28.41 78.49,31.65 78.74,31.9 78.74,32.03 80.26,33.55 81.34,33.55 L1.2 81.41,33.62 83.57,35.77 86.81,35.77 TP17.TP | 84.04,16.18 84.01,16.22 84.01,17.93 80.26,21.68 80.26,23.33 80.14,23.45 79.95,23.45 79.92,23.49
EPD_3V3_C
  Top 0.127: 73.82,25.27 73.79,25.23 72.33,25.23 72.26,25.3 72.26,27.84 72.33,27.9 75.31,27.9 75.37,27.84 75.37,27.52 75.88,27.52 Q2.1 | 73.82,25.27 74.42,25.87 74.55,25.87 R_CL1.1 | 22.07,66.41 22.54,66.89 160.08,66.89 166.24,60.73 166.24,56.16 166.5,55.9 166.5,14.88 151.89,0.28 104.9,0.28 94.87,10.31 83.69,10.31 75.25,18.76 75.25,21.55 73.85,22.95 73.85,25.23 73.82,25.27 | 22.07,66.41 20.45,64.79 20.45,63.84 U2.18 | 22.07,66.41 20.51,67.97 TP13.TP
EPD_BUSY  (via drill 0.3)
  Top 0.15: v88.39,16.41 87.57,15.58 87.57,15.2 J1.9 | TP9.TP 95.95,11.77 v95,12.72 95,12.79 95.25,13.04 95.25,22.63 91.95,25.93 v91.95,27.77 | v78.04,41.68 57.98,61.75 12.13,61.75 10.35,63.52 10.35,63.78 U2.26
  Bottom 0.15: v88.39,16.41 91.31,16.41 v95,12.72 | v91.95,27.77 v78.04,41.68
EPD_CS  (via drill 0.3)
  Top 0.15: v86.04,15.96 86.04,15.2 J1.12 | v97.73,11.71 99.44,11.71 TP10.TP | v22.86,43.71 20.51,46.06 20.51,46.31 U2.11
  Bottom 0.15: v86.04,15.96 87.31,15.96 88.2,16.85 92.58,16.85 96.17,13.26 | v97.73,11.71 96.17,13.26 | v22.86,43.71 31.5,43.71 62.93,12.28 95.19,12.28 96.17,13.26
EPD_DC  (via drill 0.3)
  Top 0.15: v85.41,18.63 86.49,17.55 86.49,15.2 J1.11 | v13.72,47.46 12.89,46.63 12.89,46.38 U2.5 | v5.4,39.2 1.97,39.2 TP11.TP
  Bottom 0.15: v85.41,18.63 84.96,18.63 82.49,21.11 82.49,21.3 77.22,26.57 53.02,26.57 50.35,29.23 50.35,30.69 33.59,47.46 v13.72,47.46 13.65,47.46 v5.4,39.2
EPD_RST  (via drill 0.3)
  Top 0.15: v93.22,16.85 88.2,16.85 87.06,15.71 87.06,15.2 J1.10 | v98.87,16.85 104.08,11.64 TP12.TP | v82.3,46.25 66.48,62.06 18.16,62.06 16.7,63.52 16.7,63.78 U2.21
  Bottom 0.15: v98.87,16.85 95.63,16.85 | 95.63,16.85 v93.22,16.85 | v82.3,46.25 95.63,32.92 95.63,16.85
FLASH_CS
  Top 0.15: 35.34,56.83 34.92,57.24 U1.1 | 35.34,56.83 35.62,56.54 35.62,55.78 35.37,55.52 34.54,55.52 32.64,53.62 32.64,49.11 33.27,48.47 33.27,48.28 R5.1 33.27,48.22 33.27,46.95 31.69,45.36 22.48,45.36 21.78,46.06 21.78,46.31 U2.12 | 35.34,56.83 36.7,58.19 42.74,58.19 43.37,57.55 43.37,55.71 43.18,55.52 42.48,55.52 41.97,55.02 41.97,54.38 35.94,48.35 35.05,48.35 D9.1
GDR  (via drill 0.3)
  Top 0.15: v89.66,13.49 91,14.82 91,15.14 J1.2 | 75.09,15.1 73.79,16.41 R4.2 | 75.09,15.1 v76.71,13.49 | 75.09,15.1 70.42,10.44 65.98,10.44 65.66,10.75 65.66,13.42 68.45,16.22 68.45,16.72 Q3.1
  Bottom 0.15: v76.71,13.49 v89.66,13.49
GND  (via drill 0.3)
  Top 0.15: 46.38,34.06 48.64,34.06 D12.2 48.7,34.06 50.29,34.06 D11.2 | 46.38,34.06 45.53,34.06 D10.2 45.53,34.12 45.53,35.52 36.58,44.47 v36.58,48.28 | U1.9 38.73,55.33 36.83,53.43 34.99,53.43 U1.4 34.92,53.43 34.92,49.94 D9.2 v35.81,49.05 | TP5.TP 75.69,108.55 71.63,108.55 TP4.TP 71.56,108.55 67.37,108.55 C5.2 67.31,108.55 66.93,108.55 65.85,107.47 RESET_BUTTON.2 65.79,107.47 62.36,107.47 RESET_BUTTON.1 62.23,107.4 57.09,102.26 52.39,102.26 C_DELAY.2 52.32,102.26 51.82,102.77 50.42,102.77 50.29,102.64 50.29,102.01 48.64,100.35 48.2,100.35 IC1.3 48.13,100.29 14.41,100.29 13.08,98.96 D8.2 | CHANGE_BUTTON.2 50.67,107.47 47.24,107.47 CHANGE_BUTTON.1 47.18,107.4 46.16,108.42 45.66,108.42 C10.2 45.59,108.48 27.37,108.48 C6.2 27.24,108.42 26.8,108.42 25.78,107.4 BOOT_BUTTON.2 25.72,107.47 22.29,107.47 BOOT_BUTTON.1 22.23,107.4 22.23,107.21 v21.53,106.51 | 3.78,93.59 2.22,95.15 2.22,95.46 J4.G4 2.22,95.53 2.22,96.48 7.18,101.43 7.3,101.43 C9.2 7.43,101.5 7.87,101.5 v8.19,101.81 | 3.78,93.59 4.7,92.67 4.83,92.67 J4.P6 | 3.78,93.59 1.21,91.02 1.21,82.38 J4.G3 | D8.2 13.02,98.96 13.02,93.5 15.43,91.08 J4.G2 15.49,91.02 16.26,90.26 16.26,87.21 15.49,86.45 15.49,85.37 J4.G1 15.43,85.31 15.43,73.43 7.75,65.75 7.75,63.91 U2.28 7.81,63.78 7.81,59.27 12.19,54.89 U2.29_3 12.26,54.82 13.46,54.82 U2.29_6 | U2.29_1 12.26,52.35 12.26,53.55 U2.29_2 | U2.29_1 12.32,52.35 13.46,52.35 U2.29_4 13.53,52.35 14.73,52.35 U2.29_7 14.73,52.41 14.73,53.55 U2.29_8 14.73,53.62 14.73,54.76 U2.29_9 13.53,54.82 U2.29_6 | v8.13,47.71 7.81,47.39 7.81,46.38 U2.1
  Top 0.15: v11.94,51.52 11.94,52.03 12.19,52.28 U2.29_1 | U2.29_5 13.46,53.62 13.46,54.76 U2.29_6 | v12.26,99.72 12.95,99.02 D8.2 | v89.03,48.47 88.27,48.47 C8.2 | C10_SUPERCAP.1 95.25,50.89 v92.84,48.47 92.84,37.36 96.71,33.49 96.71,31.33 96.52,31.14 90.87,31.14 | v90.55,52.79 84.52,58.83 84.52,60.41 U3.13 | SJ1.1 66.8,11.83 66.8,11.96 67.63,12.79 67.63,13.87 R2.1 67.75,13.93 67.88,13.93 69.91,15.96 71.94,15.96 72.39,16.41 R4.1 72.45,16.41 72.45,18.5 73.03,19.07 EPD_C1.1 73.09,19.07 73.98,19.07 74.04,19.01 EPD_C2.1 74.11,18.95 76.61,16.44 | 76.61,16.44 78.99,14.06 78.99,12.72 J1.MP2 | D6.2 76.64,23.27 77.72,22.19 78.99,22.19 EPD_C5.1 79.12,22.12 79.44,22.12 80.93,20.63 | J1.8 88.01,15.14 88.01,14.82 87.12,13.93 84.01,13.93 83.57,14.38 83.57,15.14 J1.17 83.5,15.26 83.5,18.06 80.93,20.63 | J1.MP1 92.58,12.72 92.58,13.61 94.93,15.96 94.93,20.09 93.09,21.93 EPD_C12.1 93.09,21.99 93.09,22.19 93.73,22.82 93.73,23.71 93.6,23.84 91.76,23.84 91.76,23.77 | 81.38,21.14 81.85,20.66 82.23,20.66 83,21.42 83,22.25 EPD_C7.1 83,22.38 82.3,23.07 82.3,24.15 | 81.38,21.14 81.15,21.36 81.15,22.25 EPD_C6.1 | 82.3,24.15 82.3,26 C7.2 | 86.42,22.25 87.06,22.25 EPD_C9.1 | 86.42,22.25 85.22,22.25 EPD_C8.1 85.22,22.31 84.52,23.01 84.52,23.2 83.57,24.15 82.3,24.15 | 88.27,24.03 88.27,24.34 88.01,24.6 87.12,24.6 86.42,23.9 86.42,22.25 | 88.27,24.03 88.27,23.14 89.09,22.31 89.09,22.19 EPD_C10.1 | 91.76,23.77 91.76,22.88 91.12,22.25 91.12,22.06 EPD_C11.1 | 91.5,24.03 91.76,23.77 | 88.27,24.03 91.5,24.03 | 90.87,31.14 90.87,29.42 91.5,28.79 91.5,24.03 | 90.87,31.14 90.87,32.03 D3.1 | v80.77,20.54 80.83,20.6 80.9,20.6 80.93,20.63
  Top 0.15: v81.41,21.17 81.38,21.14 | v76.77,16.6 76.61,16.44 | 128.21,44.73 125.6,42.12 125.48,42.12 IC4.2 | 128.21,44.73 128.21,47.46 R2_BAT.1 | C2_BAT.2 121.03,52.73 121.98,51.78 121.98,51.71 126.24,47.46 128.14,47.46 R2_BAT.1 | MCP73831.2 130.81,52.03 129.86,52.03 129.09,51.27 129.09,48.35 128.27,47.52 R2_BAT.1 | U4.9 139.7,54.13 139,53.43 138.68,53.43 U4.4 138.62,53.36 138.62,50.06 | U4.6 140.59,53.94 139.95,53.94 139.76,54.13 U4.9 | U4.1 138.68,54.89 139,54.89 139.7,54.19 U4.9 | 138.62,50.06 138.62,46.06 135,42.44 C1_BAT2.2 135,42.38 131.95,42.38 131.89,42.44 C3.- 131.83,42.5 129.6,44.73 128.21,44.73 | C2.2 157.48,8.66 156.4,8.66 C1.2 156.4,8.72 156.4,10.06 154.62,11.83 SENSOR2.5 154.56,11.9 154.31,11.9 153.8,12.41 153.8,12.98 154.24,13.42 154.56,13.42 SENSOR2.7 154.62,13.49 154.81,13.49 155.57,14.25 157.42,14.25 SENSOR2.1 157.54,14.31 160.97,17.74 164.27,17.74 | 164.27,17.74 165.29,17.74 J3.1 | J2.MP2 168.85,59.33 168.85,49.17 J2.MP1 168.78,49.68 v166.94,49.68 | J2.MP4 164.91,59.33 164.34,58.76 164.34,57.68 J2.A12 164.4,57.55 164.4,57.36 J2.B1 164.27,57.3 155.77,57.3 149.61,51.14 R2-USB.2 149.54,51.08 149.54,50.89 148.84,50.19 | J2.B12 164.4,51.2 164.4,50.95 J2.A1 164.4,50.89 164.4,49.68 164.91,49.17 J2.MP3 164.34,49.68 v160.72,49.68 | C1_BAT.2 122.36,39.39 120.65,41.11 120.65,41.81 R1_PWRUSB.1 120.59,41.87 120.59,42.06 119.83,42.82 119.83,48.47 | C5_USB.2 155.26,46 155.26,47.27 C4_USB.2 155.26,47.33 v155.26,48.28 | 148.84,50.19 148.84,49.43 149.03,49.24 150.43,49.24 151.07,49.87 152.65,49.87 D1.2 152.72,50 153.03,50 153.38,50.35 | 153.38,50.35 156.02,52.98 R2-USB1.2
  Top 0.15: 148.84,50.19 148.78,50.19 143.26,55.71 137.86,55.71 137.29,55.14 134.11,55.14 C1_BAT1.2 134.05,55.08 121.54,55.08 119.83,53.36 119.83,48.47 | 153.38,50.35 v153.67,50.06 | v164.27,18.38 164.27,17.74 | 138.62,50.06 v145.22,50.06 | v119.7,48.47 119.83,48.47 | 46.38,34.06 46.38,34.04 v47.69,32.73
  Bottom 0.15: v36.58,48.28 v35.81,49.05 35.31,49.05 34.23,47.97 15.56,47.97 12,51.52 v11.94,51.52 v8.13,47.71 | v8.19,101.81 10.16,101.81 v12.26,99.72 12.32,99.72 19.11,106.51 v21.53,106.51 | 90.55,48.47 v92.84,48.47 v119.7,48.47 | 90.55,48.47 v89.03,48.47 | 90.55,48.47 v90.55,52.79 | v81.41,21.17 v80.77,20.54 80.24,20.54 77.4,17.7 | v76.77,16.6 78.5,16.6 77.4,17.7 | 164.72,49.68 v160.72,49.68 160.08,49.68 158.88,48.47 155.32,48.47 v155.26,48.28 155.26,48.47 v153.67,50.06 v145.22,50.06 | 164.72,49.68 v166.94,49.68 | v164.27,18.38 164.27,18.69 164.72,19.14 164.72,49.68 | v47.69,32.73 47.82,32.73 50.04,30.5 50.04,29.11 58.93,20.22 74.87,20.22 77.16,17.92 77.16,17.93 77.4,17.7
  pour Top: 6.34,46.1 6.32,46.08 6.3,46.06 0.08,46.06 0.08,0.08 76.52,0.08 76.52,10.02 76.54,10.04 76.56,10.06 76.58,10.08 94.82,10.08 94.84,10.06 94.86,10.04 94.88,10.02 94.88,0.08 170.12,0.08 170.12,67.12 92.18,67.12 92.16,67.14 92.14,67.16 92.12,67.18 92.12,111.12 68.08,111.12 68.08,109.68 68.06,109.66 68.04,109.64 68.02,109.62 19.98,109.62 19.96,109.64 19.94,109.66 19.92,109.68 19.92,111.12 0.08,111.12 0.08,64.11 6.3,64.11 6.32,64.09 6.34,64.07 6.36,64.05 6.36,46.12
  pour Bottom: 6.34,46.1 6.32,46.08 6.3,46.06 0.08,46.06 0.08,0.08 76.52,0.08 76.52,10.02 76.54,10.04 76.56,10.06 76.58,10.08 94.82,10.08 94.84,10.06 94.86,10.04 94.88,10.02 94.88,0.08 170.12,0.08 170.12,67.12 92.18,67.12 92.16,67.14 92.14,67.16 92.12,67.18 92.12,111.12 68.08,111.12 68.08,109.68 68.06,109.66 68.04,109.64 68.02,109.62 19.98,109.62 19.96,109.64 19.94,109.66 19.92,109.68 19.92,111.12 0.08,111.12 0.08,64.11 6.3,64.11 6.32,64.09 6.34,64.07 6.36,64.05 6.36,46.12
  pour Top: 6.34,46.1 6.32,46.08 6.3,46.06 0.08,46.06 0.08,0.08 76.52,0.08 76.52,10.02 76.54,10.04 76.56,10.06 76.58,10.08 94.82,10.08 94.84,10.06 94.86,10.04 94.88,10.02 94.88,0.08 170.12,0.08 170.12,67.12 92.18,67.12 92.16,67.14 92.14,67.16 92.12,67.18 92.12,111.12 68.08,111.12 68.08,109.68 68.06,109.66 68.04,109.64 68.02,109.62 19.98,109.62 19.96,109.64 19.94,109.66 19.92,109.68 19.92,111.12 0.08,111.12 0.08,64.11 6.3,64.11 6.32,64.09 6.34,64.07 6.36,64.05 6.36,46.12
  pour Bottom: 6.34,46.1 6.32,46.08 6.3,46.06 0.08,46.06 0.08,0.08 76.52,0.08 76.52,10.02 76.54,10.04 76.56,10.06 76.58,10.08 94.82,10.08 94.84,10.06 94.86,10.04 94.88,10.02 94.88,0.08 170.12,0.08 170.12,67.12 92.18,67.12 92.16,67.14 92.14,67.16 92.12,67.18 92.12,111.12 68.08,111.12 68.08,109.68 68.06,109.66 68.04,109.64 68.02,109.62 19.98,109.62 19.96,109.64 19.94,109.66 19.92,109.68 19.92,111.12 0.08,111.12 0.08,64.11 6.3,64.11 6.32,64.09 6.34,64.07 6.36,64.05 6.36,46.12
GPIO8  (via drill 0.3)
  Top 0.15: v18.86,42.63 19.49,42 R1.1 | v18.86,45.17 18.86,46 19.18,46.31 U2.10
  Bottom 0.15: v18.86,45.17 v18.86,42.63
I2C_PW  (via drill 0.3)
  Top 0.15: SENSOR2.6 154.56,12.72 155.64,12.72 156.34,13.42 157.42,13.42 SENSOR2.2 157.54,13.49 157.73,13.49 158.69,12.53 158.69,8.53 157.54,7.39 C2.1 157.48,7.33 156.4,7.33 C1.1 156.34,7.39 156.34,7.52 155.26,8.6 R1_PINH.2 155.19,8.66 154.11,8.66 R2-PINH.2 154.11,8.72 153.48,9.36 153.48,13.42 | 153.48,13.42 154.31,14.25 154.56,14.25 SENSOR2.8 | v119.38,44.47 97.79,66.06 23.69,66.06 21.78,64.16 21.78,63.84 U2.17 | 153.48,13.42 v150.43,13.42
  Bottom 0.15: v150.43,13.42 v119.38,44.47
INT_RTC  (via drill 0.3)
  Top 0.15: R1_PINH1.1 92.58,60.54 92.58,57.55 92.71,57.43 TP15.TP 92.52,57.55 v90.61,57.55 | v30.8,51.14 21.21,51.14 16.7,46.63 16.7,46.38 U2.8 | U3.3 83.19,51.14 82.93,50.89 v82.93,49.74 83,49.87 84.84,49.87 85.03,50.06 85.03,51.97 v86.74,53.68
  Bottom 0.15: v30.8,51.14 32.13,49.81 82.87,49.81 v82.93,49.74 | v86.74,53.68 v90.61,57.55
IO/BOOT  (via drill 0.3)
  Top 0.15: 24.32,106.07 21.34,106.07 20.77,106.64 20.77,107.21 R_BOOT.1 20.77,107.28 20.77,107.47 22.23,108.93 BOOT_BUTTON.4 22.35,108.93 25.72,108.93 BOOT_BUTTON.3 | 24.32,106.07 25.97,106.07 27.05,107.15 27.24,107.15 C6.1 | v24.32,65.3 24.32,63.84 U2.15 | v24.32,106.01 24.32,106.07
  Bottom 0.15: v24.32,106.01 v24.32,65.3
IO/CHANGE  (via drill 0.3)
  Top 0.15: CHANGE_BUTTON.4 47.24,108.93 50.67,108.93 CHANGE_BUTTON.3 50.74,108.86 50.99,108.86 52.2,107.66 R_CHANGE.1 52.2,107.53 52.2,107.4 51.5,106.7 46.42,106.7 | 46.42,106.7 45.97,107.15 45.66,107.15 C10.1 | v46.29,97.75 14.16,65.62 14.16,63.84 U2.23 | v46.29,106.51 46.42,106.64 46.42,106.7
  Bottom 0.15: v46.29,106.51 v46.29,97.75
MISO  (via drill 0.3)
  Top 0.15: 47.82,29.3 47.18,29.3 46.55,29.93 44.96,29.93 44.83,29.8 44.83,26.5 48.58,22.76 TP6.TP | 47.82,29.3 48.51,29.3 R8.1 | v47.82,32.09 48.2,32.47 48.64,32.47 D12.1 | 47.82,29.3 v47.82,29.8 | v24.19,56.03 32.32,56.03 | 32.32,56.03 34.86,56.03 U1.2 | v16.57,56.03 9.08,63.52 9.08,63.78 U2.27 9.02,63.91 9.02,66.57 15.88,73.43 v15.88,82.13 | J4.P7 4.25,93.75 v3.94,94.07 | v32.7,47.01 32.7,47.78 32.32,48.16 32.32,56.03
  Bottom 0.15: v47.82,29.8 v47.82,32.09 47.62,32.09 v32.7,47.01 | v16.57,56.03 v24.19,56.03 | v15.88,82.13 v3.94,94.07
MOSI  (via drill 0.3)
  Top 0.15: v15.43,43.71 15.43,46.31 U2.7 15.43,46.38 15.43,46.63 16.57,47.78 v16.57,48.41 | v15.43,40.54 15.43,39.39 15.62,39.2 TP7.TP | v4.32,88.61 5.02,89.31 J4.P3 | v84.96,19.27 84.96,15.2 J1.14 | v50.99,29.23 50.16,29.23 R7.1 | v42.74,38.95 42.74,53.43 U1.5 | v49.47,33.23 50.16,32.54 50.29,32.54 D11.1
  Bottom 0.15: v15.43,40.54 v15.43,43.71 | v4.32,88.61 4.32,66.38 6.92,63.78 6.92,58.06 v16.57,48.41 34.23,48.41 35.31,49.49 36.01,49.49 42.74,42.76 v42.74,38.95 42.74,38.76 48.86,32.63 | v84.96,19.27 77.34,26.88 53.34,26.88 v50.99,29.23 50.99,30.5 48.86,32.63 | 48.86,32.63 v49.47,33.23
N$1
  Top 0.15: R2-USB1.1 156.91,51.71 161.73,51.71 163,52.98 164.34,52.98 J2.A5
N$2
  Top 0.15: R2-USB.1 149.61,49.87 149.92,49.87 156.02,55.97 164.34,55.97 J2.B5
N$3  (via drill 0.3)
  Top 0.15: v123.25,41.23 122.43,41.23 D2.1 | IC4.3 125.41,41.17 125.35,41.23 v124.59,41.23 124.71,41.3 124.71,42.44 125.28,43.01 125.41,43.01 IC4.1 | v134.05,51.97 134.05,53.81 C1_BAT1.1 | v137.03,49.3 137.54,48.79 137.54,48.47 Q1.2
  Bottom 0.15: v123.25,41.23 v124.59,41.23 124.59,41.3 134.05,50.76 | 134.05,50.76 v134.05,51.97 | v137.03,49.3 135.57,49.3 134.11,50.76 134.05,50.76
N$4
  Top 0.15: D7.1 87.25,64.67 87.25,63.02 87.38,62.89 R_CAPACITOR.1
N$5
  Top 0.15: IC1.5 50.99,102.2 51.12,102.2 52.32,100.99 C_DELAY.1
N$6  (via drill 0.3)
  Top 0.15: v126.94,51.97 126.3,51.33 R1_BAT.2 | v129.86,51.4 130.56,51.4 130.81,51.14 MCP73831.1
  Bottom 0.15: v126.94,51.97 129.29,51.97 v129.86,51.4
N$7
  Top 0.15: C4.1 95.95,31.77 94.61,31.77 94.36,32.03 D3.2 94.23,32.09 87.76,38.57 82.49,38.57 81.85,37.93 79.69,37.93 D4.1
N$8
  Top 0.15: CHG_LED.C 124.84,52.67 124.84,51.4 124.9,51.33 R1_BAT.1
N$9
  Top 0.15: J1.24 80.07,15.14 80.07,14.76 82.74,12.09 90.61,12.09 94.61,16.09 94.61,19.27 92.39,21.49 92.39,22.57 93.03,23.2 EPD_C12.2
N$12
  Top 0.15: J1.22 81.03,15.14 81.03,14.82 83.44,12.41 90.49,12.41 94.3,16.22 94.3,17.74 89.79,22.25 89.79,22.76 89.15,23.39 EPD_C10.2
N$14  (via drill 0.3)
  Top 0.15: v82.55,16.6 82.04,16.09 82.04,15.2 J1.20 | v85.92,22.82 85.22,23.52 EPD_C8.2
  Bottom 0.15: v82.55,16.6 84.01,16.6 85.92,18.5 v85.92,22.82
N$15
  Top 0.15: J1.19 82.55,15.14 82.55,14.82 84.33,13.04 90.23,13.04 93.66,16.47 93.66,17.04 89.47,21.23 85.09,21.23 83.69,22.63 83.69,22.95 83.06,23.58 EPD_C7.2
N$16  (via drill 0.3)
  Top 0.15: v83,17.93 83,15.2 J1.18 | v82.04,21.11 82.04,22.69 81.15,23.58 EPD_C6.2
  Bottom 0.15: v83,17.93 83,20.15 v82.04,21.11
N$17
  Top 0.15: R2_BAT.2 128.27,48.79 128.27,51.08 MCP73831.5
N$18  (via drill 0.3)
  Top 0.15: v88.2,14.38 89.6,14.38 89.98,14.76 89.98,15.14 J1.4 | v72.39,19.77 73.03,20.41 EPD_C1.2
  Bottom 0.15: v88.2,14.38 84.84,14.38 83.69,15.52 76.64,15.52 v72.39,19.77
N$19  (via drill 0.3)
  Top 0.15: v89.09,15.96 89.47,15.58 89.47,15.2 J1.5 | v74.74,19.64 74.11,20.28 EPD_C2.2
  Bottom 0.15: v89.09,15.96 87.76,15.96 87.31,15.52 84.14,15.52 83.82,15.84 76.9,15.84 74.74,17.99 v74.74,19.64
PREVGH  (via drill 0.3)
  Top 0.15: J1.21 81.53,15.14 81.53,14.82 83.63,12.72 90.36,12.72 93.98,16.34 93.98,17.17 89.6,21.55 88.58,21.55 87.82,22.31 87.82,22.76 87.12,23.45 EPD_C9.2 87.19,23.52 v87.82,24.15 | v88.84,26.38 90.68,28.22 D5.1
  Bottom 0.15: v88.84,26.38 88.84,25.93 87.82,24.92 v87.82,24.15
PREVGL  (via drill 0.3)
  Top 0.15: v81.22,16.28 80.58,15.64 80.58,15.2 J1.23 | v90.42,22.69 91.06,23.33 EPD_C11.2 | v88.39,24.85 88.39,35.97 86.49,37.87 83.19,37.87 D4.2
  Bottom 0.15: v81.22,16.28 82.23,16.28 82.36,16.15 84.01,16.15 90.42,22.57 v90.42,22.69 90.42,22.82 v88.39,24.85
RESE  (via drill 0.3)
  Top 0.15: v87.76,13.93 89.6,13.93 90.49,14.82 90.49,15.14 J1.3 | v71.37,13.93 70.99,13.93 70.55,13.49 R3.2 70.55,13.42 71.18,12.79 71.18,11.71 70.23,10.75 66.1,10.75 65.98,10.88 65.98,13.29 67.25,14.56 67.44,14.56 69.6,16.72 69.79,16.72 Q3.2
  Bottom 0.15: v71.37,13.93 v87.76,13.93
RESE'
  Top 0.15: 68.96,12.15 68.64,12.15 68.33,11.83 SJ1.2 | 68.96,12.15 70.48,12.15 R3.1 | 68.96,12.15 68.96,13.87 R2.2
RESET  (via drill 0.3)
  Top 0.15: C5.1 67.31,107.28 76.2,107.28 76.96,108.04 76.96,108.99 76.2,109.75 68.45,109.75 67.82,109.12 65.98,109.12 65.85,108.99 RESET_BUTTON.3 65.79,108.93 62.36,108.93 RESET_BUTTON.4 62.23,108.93 61.53,108.93 61.34,109.12 v56.26,109.12 | v49.34,102.26 48.2,102.26 IC1.1 | v54.29,107.21 60.77,107.21 R_RESET.1 | v7.05,64.86 6.92,64.73 6.92,55.46 10.29,52.09 10.29,46.38 U2.3
  Bottom 0.15: v7.05,64.86 19.62,64.86 23.62,60.86 24,60.86 49.34,86.19 v49.34,102.26 v54.29,107.21 54.36,107.21 v56.26,109.12
RTC_RST
  Top 0.15: U2.16 23.05,63.84 23.05,64.67 24.13,65.75 77.28,65.75 81.47,61.55 81.47,54.89 84.45,51.9 84.45,51.2 U3.4
RX
  Top 0.15: U2.24 12.89,63.84 12.89,66.06 13.59,66.76 TP2.TP
SCK  (via drill 0.3)
  Top 0.15: v84.2,14.38 85.09,14.38 85.47,14.76 85.47,15.14 J1.13 | v61.47,14.38 60.52,14.38 45.59,29.3 R6.1 45.91,29.04 v46.35,29.49 | v3.49,92.61 4.51,91.59 5.02,91.59 J4.P5 | v3.49,98.39 3.49,98.51 2.6,99.4 TP8.TP | 46.35,31.65 50.67,31.65 50.99,31.96 50.99,46.12 42.74,54.38 42.74,54.7 U1.6 42.8,54.7 43.69,55.59 43.69,57.68 42.86,58.51 26.04,58.51 | 46.35,31.65 45.53,32.47 D10.1 | 26.04,58.51 14.16,46.63 14.16,46.38 U2.6 | v23.81,61.3 23.81,60.79 26.04,58.57 26.04,58.51 | v46.35,31.58 46.35,31.65
  Bottom 0.15: v61.47,14.38 v84.2,14.38 | v3.49,98.39 v3.49,92.61 3.49,91.91 23.81,71.59 v23.81,61.3 | v46.35,31.58 v46.35,29.49
SCL  (via drill 0.3)
  Top 0.15: U2.20 17.97,63.78 17.97,63.52 19.11,62.38 78.74,62.38 80.64,60.48 U3.16 80.71,60.41 80.71,59.33 v81.03,59.02 | 141.45,54.03 144.97,50.51 145.41,50.51 149.22,46.7 v149.22,36.92 | 141.45,54.03 141.1,54.38 140.65,54.38 U4.7 | v164.27,21.87 165.29,20.85 J3.4 | v153.42,7.96 154.05,7.33 R2-PINH.1 | v156.34,12.79 157.23,11.9 157.42,11.9 SENSOR2.4 | v141.41,54 141.45,54.03
  Bottom 0.15: v149.22,36.92 v164.27,21.87 164.27,21.8 155.8,13.33 | v153.42,7.96 153.42,10.95 155.8,13.33 | 155.8,13.33 v156.34,12.79 | v81.03,59.02 132.72,59.02 137.73,54 v141.41,54
SDA  (via drill 0.3)
  Top 0.15: v79.69,62.7 20.07,62.7 19.24,63.52 19.24,63.78 U2.19 | v80.96,62.7 80.96,62.51 81.92,61.55 81.92,60.48 U3.15 | v155.26,6.56 155.26,7.26 R1_PINH.1 | v158.24,9.55 158.24,12.15 157.73,12.66 157.48,12.66 SENSOR2.3 | 141.41,54.89 141.48,54.89 149.54,46.82 149.54,37.23 163.83,22.95 163.83,20.98 164.97,19.84 165.29,19.84 J3.3 164.85,19.9 v164.27,19.33 | 141.41,54.89 140.65,54.89 U4.8 | 141.41,54.89 v141.41,54.7
  Bottom 0.15: v79.69,62.7 v80.96,62.7 133.41,62.7 v141.41,54.7 | v155.26,6.56 v158.24,9.55 158.24,13.29 v164.27,19.33
SRC  (via drill 0.3)
  Top 0.15: v95.19,32.73 95.44,32.98 95.95,32.98 C4.2 | v95.19,29.23 94.23,28.28 D5.2 | v71.82,27.33 69.22,24.73 69.22,18.88 Q3.3 | v81.41,27.39 81.41,28.98 L1.1
  Bottom 0.15: v95.19,32.73 v95.19,29.23 95.12,29.23 93.22,27.33 81.41,27.33 | 81.41,27.33 v71.82,27.33 | v81.41,27.39 81.41,27.33
SS_SD  (via drill 0.3)
  Top 0.15: R10.1 9.34,100.23 10.29,100.23 11.49,99.02 D8.1 11.49,98.96 11.49,92.16 v7.05,87.72 | v7.37,62.7 7.37,55.46 11.56,51.27 11.56,46.38 U2.4 | v6.16,87.53 5.46,88.23 J4.P2
  Bottom 0.15: v7.37,62.7 7.37,63.91 6.16,65.11 v6.16,87.53 6.22,87.53 6.41,87.72 v7.05,87.72
TX
  Top 0.15: U2.25 11.56,63.84 11.56,66.13 10.99,66.7 TP1.TP
USB_D+  (via drill 0.3)
  Top 0.15: v151.57,50.89 152.65,50.89 D1.1 | v25.46,49.94 25.46,47.52 24.32,46.38 U2.14
  Bottom 0.15: v151.57,50.89 136.53,50.89 129.09,58.32 33.85,58.32 v25.46,49.94
USB_D-  (via drill 0.3)
  Top 0.15: v150.81,48.98 152.65,48.98 D1.3 | v25.02,48.86 25.02,48.6 23.05,46.63 23.05,46.38 U2.13
  Bottom 0.15: v150.81,48.98 137.99,48.98 128.97,58 34.16,58 v25.02,48.86
VBAT  (via drill 0.3)
  Top 0.127: 137.6,54 137.67,53.94 138.62,53.94 U4.3 | 137.6,54 137.6,54.38 137.67,54.44 v137.92,54.44 138.62,54.44 U4.2 | 137.6,54 136.59,52.98 136.59,50.57 Q1.3 136.59,50.51 136.59,47.9 136.33,47.65 134.94,47.65 134.87,47.71 134.87,50.12 132.02,52.98 130.87,52.98 MCP73831.3 130.81,52.98 129.73,52.98 129.16,52.41 128.08,52.41 127.06,51.4 127.06,50.7 126.87,50.51 123.57,50.51 122.3,51.78 122.3,52.73 C2_BAT.1 | v138.88,56.16 138.88,63.21 TP3.TP
  Bottom 0.127: v138.88,56.16 138.88,55.4 v137.92,54.44
VBUS
  Top 0.127: D1.5 155.19,49.94 154.24,49.94 154.05,49.74 154.05,48.47 153.99,48.41 153.99,47.33 C4_USB.1 153.99,47.27 153.99,46 C5_USB.1 153.99,45.93 153.99,45.43 149.92,45.43 149.89,45.39 | 149.89,45.39 149.86,45.36 149.86,41.17 149.92,41.11 154.43,41.11 155.45,42.12 155.45,43.08 | 155.45,43.08 155.45,43.2 PFMF.050.1.2 155.45,43.08 | C1_BAT.1 123.7,39.39 123.7,43.14 123.51,43.33 122.43,43.33 D2.2 122.36,43.33 121.79,43.33 121.6,43.14 120.65,43.14 R1_PWRUSB.2 120.59,43.14 120.14,43.14 120.14,53.3 120.4,53.55 125.41,53.55 125.6,53.36 125.6,52.79 125.67,52.73 126.24,52.73 CHG_LED.A 126.3,52.73 127.25,52.73 127.51,52.98 128.21,52.98 MCP73831.4 128.27,52.98 129.35,52.98 129.98,53.62 131.76,53.62 134.97,50.41 | 134.97,50.41 135.64,49.74 135.64,48.47 Q1.1 | 134.97,50.41 136.33,51.78 136.33,53.11 137.35,54.13 137.35,54.51 137.48,54.63 137.48,54.95 137.92,55.4 141.35,55.4 149.86,46.89 149.86,45.43 149.89,45.39 | 155.45,43.08 158.69,43.08 TP14.TP
VRTC
  Top 0.127: R_CAPACITOR.2 88.71,62.83 88.71,61.87 88.65,61.81 83.5,61.81 83.25,61.55 83.25,60.48 U3.14 83.25,60.41 83.25,59.46 90.36,52.35 91.31,52.35 91.34,52.32 | 91.34,52.32 92.08,53.05 94.11,53.05 94.17,53.11 95.25,53.11 C10_SUPERCAP.2 | 91.34,52.32 91.31,52.28 91.31,50.51 90.42,49.62 87.12,49.62 86.93,49.43 86.93,48.47 C8.1
VUSB
  Top 0.127: 163.35,51.75 163.32,51.78 163.32,51.97 163.39,52.03 164.34,52.03 J2.B9 164.4,52.03 165.48,52.03 166.24,52.79 166.24,55.78 165.48,56.54 164.4,56.54 J2.B4 164.34,56.54 163.39,56.54 163.32,56.6 163.32,56.73 163.39,56.79 164.34,56.79 J2.A9 | 163.35,51.75 163.39,51.71 J2.A4 | 163.35,51.75 163.32,51.71 162.12,51.71 155.7,45.3 154.62,45.3 154.5,45.17 151.76,45.17 150.94,44.35 150.94,43.27 PFMF.050.1.1

## Text on the board
tPlace: GND | GND | 3V3 | SCK | EPD_3V3_C | TX | RX | VBAT | INT_RTC | VBUS | EPD_DC | MOSI | MISO | EPD_BUSY | EPD_RST | EPD_CS